# Allegro board c100s_85x45.brd
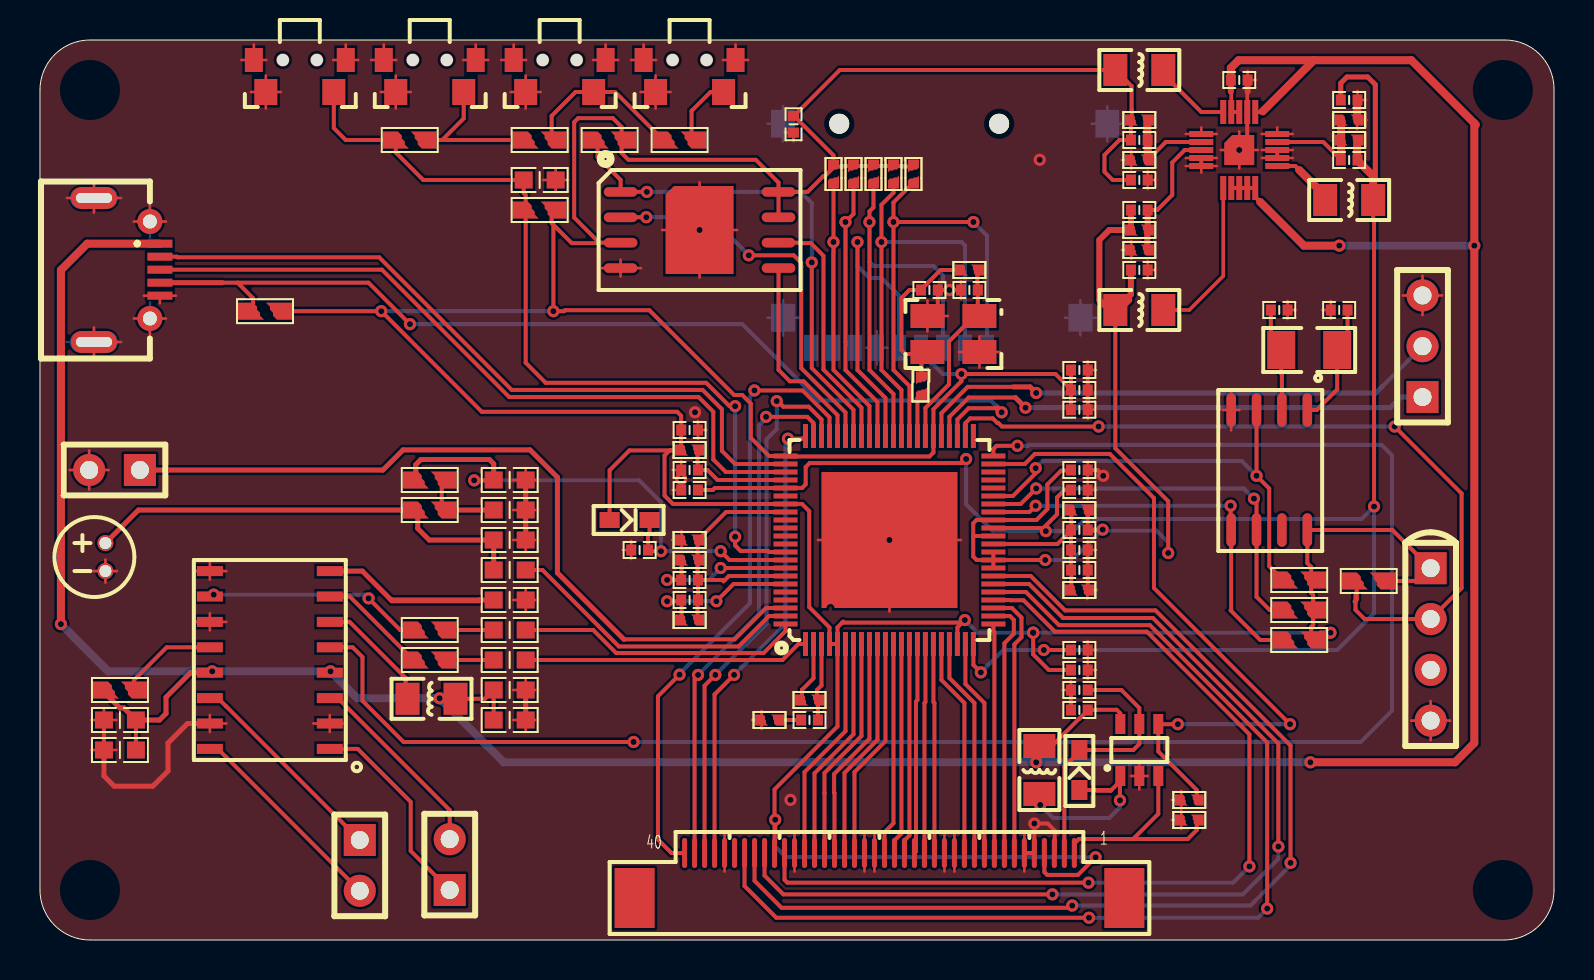
[diagram p0: board, top side]
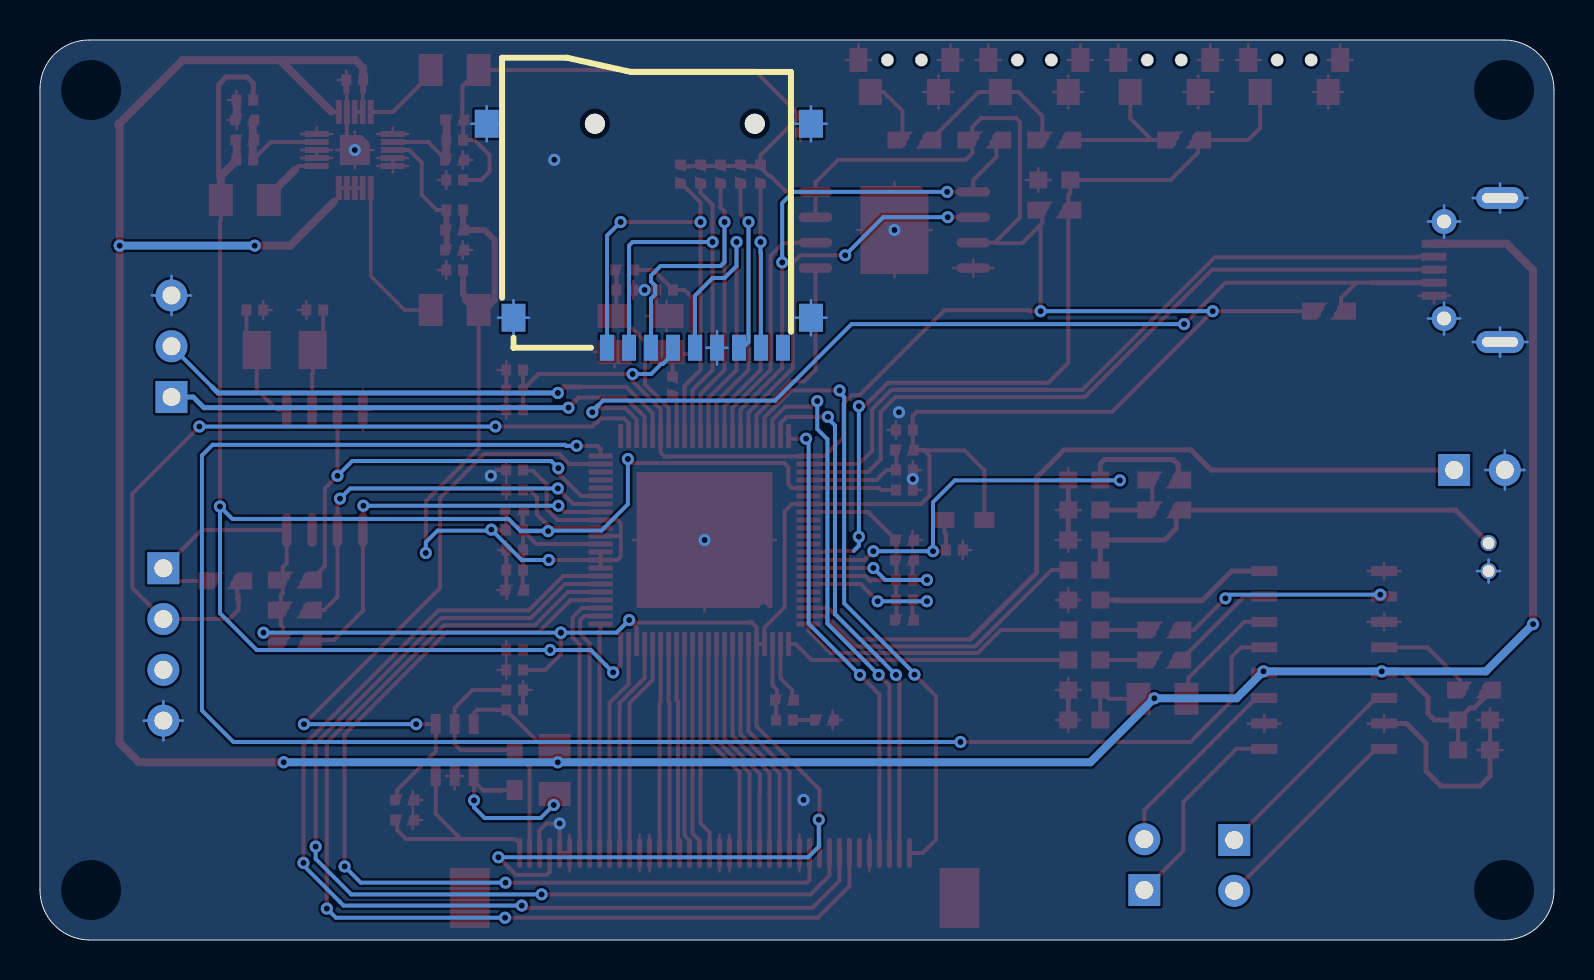
[diagram p1: board, bottom side, seen from below]

Outline 75.75 x 45 mm; copper layers: TOP, BOTTOM. Coordinates in mm from the lower left corner of the outline.
Outline path: 0,42.5 0,2.5 arc(0.73,0.73) 2.5,0 73.3,0 arc(75.03,0.75) 75.75,2.5 75.75,42.6 arc(75.01,44.3) 73.3,45 2.5,45 arc(0.73,44.27) 0,42.5

## Design rules (mm)
constraint set DEFAULT: min track width 0.127

## Placement (name value [footprint] x y rotation side)
C1  1uF  [CAP0402]  32.5 23.5 180 top
C2  33pF  [CAP0402]  46.5 32.5 0 top
C3  33pF  [CAP0402]  44.5 32.5 180 top
C4  0.1uF  [CAP0402]  37.7 40.79 270 top
C5  12pF  [CAP0402]  65 31.5 0 top
C6  12pF  [CAP0402]  62 31.5 180 top
C7  1uF  [CAP0603]  23.5 12.5 0 top
C8  10uF  [CAP0603]  23.5 11 0 top
C9  10uF  [CAP0603]  4 9.5 180 top
C10  1uF  [CAP0603]  4 11 180 top
C11  220nF  [CAP0603]  23.5 14 180 top
C12  220nF  [CAP0603]  23.5 15.5 0 top
C13  1uF  [CAP0603]  23.5 17 180 top
C14  104  [CAP0603]  25 38 0 top
C15  104  [CAP0603]  23.5 18.5 0 top
C16  220nF  [CAP0402]  38.5 11 180 top
C17  10uF  [CAP0603]  23.5 23 180 top
C18  10uF  [CAP0603]  23.5 21.5 180 top
C19  3.3nF  [CAP0603]  23.5 20 180 top
C20  220pF  [CAP0402]  55 40 180 top
C21  10uF  [CAP0402]  55 38 180 top
C22  220pF  [CAP0402]  65.5 39 180 top
C23  1uF  [CAP0402]  60 43 180 top
C24  0.1uF  [CAP0402]  32.5 25.5 0 top
C25  0.1uF  [CAP0402]  52 27.5 0 top
C26  0.1uF  [CAP0402]  52 28.5 0 top
C27  1uF  [CAP0402]  55 36.5 0 top
C28  10uF  [CAP0402]  55 33.5 0 top
C29  10uF  [CAP0402]  65.5 42 180 top
C30  1uF  [CAP0402]  52 11.5 180 top
C31  0.1uF  [CAP0402]  52 23.5 0 top
C36  0.1uF  [CAP0402]  52 22.5 0 top
C37  0.1uF  [CAP0402]  32.5 22.5 180 top
C38  0.1uF  [CAP0402]  52 14.5 0 top
C39  0.1uF  [CAP0402]  52 13.5 0 top
C40  0.1uF  [CAP0402]  52 26.51 0 top
C42  0.22uF  [CAP0402]  52 12.5 180 top
C43  0.1uF  [CAP0402]  52 20.5 180 top
C44  1uF  [CAP0402]  32.5 18 0 top
C45  1uF  [CAP0402]  32.5 17 0 top
C46  0.1uF  [CAP0402]  30 19.5 180 top
C47  0.1uF  [CAP0402]  52 19.5 0 top
C48  0.1uF  [CAP0402]  52 18.5 0 top
D1  1N4148  [1N4148-SOD323]  52 8.5 270 top
D2  1N4148  [1N4148-SOD323]  29.5 21 180 top
J1  HEADER 40/SM  [FPC-40]  42 2 0 top
J2  Debug  [HEADER1X3_2_54]  69.17 27.15 180 top
J3  -  [TF-SOCKET]  47.38 29.61 0 bottom
J4  USB  [MICROUSB]  5.5 33.5 90 top
J6  Speaker Left  [HEADER1X2_2_54]  20.5 2.5 180 top
J7  Speaker Right  [HEADER1X2_2_54]  16 5 0 top
J8  LINE IN  [HEADER1X2_2_54]  5 23.5 270 top
L1  10uH  [MLF2012]  19.59 12.06 180 top
L2  1.5uH  [MLF2012]  55 43.5 0 top
L3  1.5uH  [MLF2012]  65.5 37 0 top
L4  1.5uH  [MLF2012]  55 31.5 0 top
L5  22uH  [MLF2012]  50 8.5 270 top
R1  10K  [RES0402]  32.5 24.5 180 top
R2  1M  [RES0402]  46.5 33.5 180 top
R3  10K  [RES0603]  28.5 40 0 top
R4  0R  [RES0402]  44.1 27.7 90 top
R5  47K  [RES0402]  43.7 38.3 270 top
R6  47K  [RES0402]  42.7 38.3 270 top
R7  47K  [RES0402]  41.7 38.3 270 top
R8  10K  [RES0603]  11.26 31.44 0 top
R9  47K  [RES0402]  40.7 38.3 270 top
R10  10K  [RES0603]  66.48 17.95 0 top
R11  47K  [RES0402]  39.7 38.3 270 top
R12  10K  [RES0603]  63 16.5 0 top
R13  10K  [RES0603]  63 15 0 top
R14  10K  [RES0603]  63 18 0 top
R15  10K  [RES0603]  4 12.5 180 top
R16  10K  [RES0603]  19.5 14 180 top
R17  10K  [RES0603]  19.5 15.5 0 top
R18  100K  [RES0603]  25 36.5 0 top
R19  0R  [RES0402]  38.5 12 0 top
R20  22R  [RES0402]  36.5 11 180 top
R21  10K  [RES0603]  19.5 23 0 top
R22  10K  [RES0603]  19.5 21.5 180 top
R23  10K  [RES0603]  18.5 40 0 top
R24  10K  [RES0603]  25 40 0 top
R25  10K  [RES0603]  32 40 0 top
R26  550K  [RES0402]  55 41 180 top
R27  110K  [RES0402]  55 39 180 top
R28  47K  [RES0402]  55 34.5 180 top
R29  100K  [RES0402]  65.5 41 180 top
R30  100K  [RES0402]  65.5 40 180 top
R31  152K  [RES0402]  55 35.5 0 top
R32  5R1  [RES0402]  57.5 6 180 top
R33  100K  [RES0402]  57.5 7 180 top
R34  2K  [RES0402]  52 21.5 0 top
R35  200K  [RES0402]  32.5 19 180 top
R36  200K  [RES0402]  32.5 16 180 top
R37  2K  [RES0402]  52 17.5 180 top
R38  0R  [RES0402]  32.5 20 0 top
SW2  TS_018-4.55x3.5x1.8  [TS_018-4P55X3P5X1P8]  13 44 90 top
SW3  TS_018-4.55x3.5x1.8  [TS_018-4P55X3P5X1P8]  19.5 44 90 top
SW4  TS_018-4.55x3.5x1.8  [TS_018-4P55X3P5X1P8]  26 44 90 top
SW5  TS_018-4.55x3.5x1.8  [TS_018-4P55X3P5X1P8]  32.5 44 90 top
U1  F1C100S  [F1C100S-MQFN]  42.5 20 90 top
U2  GD5FxG4UAYIG  [GD5F1GQ4X_W25QXX_SOP8_208MIL]  33 35.5 0 top
U3  DHT11  [HEADER1X4_2_54]  69.58 18.59 0 top
U4  PCF8563  [PCF8563-SO8-3]  61.5 23.5 270 top
U5  PAM8403  [PAM8403-SOP16]  11.5 14 180 top
U6  MIC  [GMI4015-MIC]  2.72 19.15 0 top
U7  EA3036  [EA3036-QFN20]  60 39.5 0 top
U8  PT4101  [PT4101-SOT23-6]  55 9.5 90 top
Y1  YSX321SL  [YSX321SL-3_2X2_5X0_8]  45.7 30.3 180 top
Y2  32.768KHz  [CRYSTAL-3215]  63.5 29.5 0 top

## Library data of the parts
C1-C31 C36-C40 C42-C48 = CAPACITOR NON-POL
D1 D2 = DIODE
J1 = HEADER 40/SM
J2 = HEADER 3
J3 = TF-SOCKET
J4 = MICROUSB
J6-J8 = HEADER 2
L1-L5 = INDUCTOR/SM
R1-R38 = RESISTOR/SM
SW2-SW5 = TS_018-4.55x3.5x1.8
U1 = F1C100S
U2 = GD5FxG4UAYIG
U3 = DHT11
U4 = PCF8563-SOP8
U5 = PAM8403
U6 = MIC
U7 = ea3036
U8 = PT4101
Y1 = YSX321SL
Y2 = CRYSTAL/SM

## Footprints (pads in the part's own frame, mm; a bottom-side part is the same pattern mirrored in y, then rotated)
1N4148-SOD323
  custom 1x0.8 smd: 1(-1,0) 2(1,0)
CAP0402
  custom 0.5x0.55 smd: 1(-0.42,0) 2(0.42,0)
CAP0603
  custom 0.9x0.85 smd: 1(-0.8,0) 2(0.8,0)
CRYSTAL-3215
  custom 1.4x1.9 smd: 1(-1.4,0) 2(1.4,0)
EA3036-QFN20
  custom 1.2x0.3 smd: 1(-1.9,0.8) 2(-1.9,0.4) 3(-1.9,0) 4(-1.9,-0.4) 5(-1.9,-0.8) 11(1.9,-0.8) 12(1.9,-0.4) 13(1.9,0) 14(1.9,0.4) 15(1.9,0.8)
  custom 0.3x1.2 smd: 6(-0.8,-1.9) 7(-0.4,-1.9) 8(0,-1.9) 9(0.4,-1.9) 10(0.8,-1.9) 16(0.8,1.9) 17(0.4,1.9) 18(0,1.9) 19(-0.4,1.9) 20(-0.8,1.9)
  custom 1.5x1.5 smd: 21(0,0)
F1C100S-MQFN
  custom 1.2x0.25 smd: 1(-5.2,4.2) 2(-5.2,3.8) 3(-5.2,3.4) 4(-5.2,3) 5(-5.2,2.6) 6(-5.2,2.2) 7(-5.2,1.8) 8(-5.2,1.4) 9(-5.2,1) 10(-5.2,0.6) 11(-5.2,0.2) 12(-5.2,-0.2) 13(-5.2,-0.6) 14(-5.2,-1) 15(-5.2,-1.4) 16(-5.2,-1.8) 17(-5.2,-2.2) 18(-5.2,-2.6) 19(-5.2,-3) 20(-5.2,-3.4) 21(-5.2,-3.8) 22(-5.2,-4.2) 45(5.2,-4.2) 46(5.2,-3.8) 47(5.2,-3.4) 48(5.2,-3) 49(5.2,-2.6) 50(5.2,-2.2) 51(5.2,-1.8) 52(5.2,-1.4) 53(5.2,-1) 54(5.2,-0.6) 55(5.2,-0.2) 56(5.2,0.2) 57(5.2,0.6) 58(5.2,1) 59(5.2,1.4) 60(5.2,1.8) 61(5.2,2.2) 62(5.2,2.6) 63(5.2,3) 64(5.2,3.4) 65(5.2,3.8) 66(5.2,4.2)
  custom 0.25x1.2 smd: 23(-4.2,-5.2) 24(-3.8,-5.2) 25(-3.4,-5.2) 26(-3,-5.2) 27(-2.6,-5.2) 28(-2.2,-5.2) 29(-1.8,-5.2) 30(-1.4,-5.2) 31(-1,-5.2) 32(-0.6,-5.2) 33(-0.2,-5.2) 34(0.2,-5.2) 35(0.6,-5.2) 36(1,-5.2) 37(1.4,-5.2) 38(1.8,-5.2) 39(2.2,-5.2) 40(2.6,-5.2) 41(3,-5.2) 42(3.4,-5.2) 43(3.8,-5.2) 44(4.2,-5.2) 67(4.2,5.2) 68(3.8,5.2) 69(3.4,5.2) 70(3,5.2) 71(2.6,5.2) 72(2.2,5.2) 73(1.8,5.2) 74(1.4,5.2) 75(1,5.2) 76(0.6,5.2) 77(0.2,5.2) 78(-0.2,5.2) 79(-0.6,5.2) 80(-1,5.2) 81(-1.4,5.2) 82(-1.8,5.2) 83(-2.2,5.2) 84(-2.6,5.2) 85(-3,5.2) 86(-3.4,5.2) 87(-3.8,5.2) 88(-4.2,5.2)
  custom 6.8x6.8 smd: 89(0,0)
FPC-40
  rect 2x3 smd: (-12.25,0.1) (12.25,0.1)
  oval 0.25x1.5 smd: 1(9.75,2.35) 2(9.25,2.35) 3(8.75,2.35) 4(8.25,2.35) 5(7.75,2.35) 6(7.25,2.35) 7(6.75,2.35) 8(6.25,2.35) 9(5.75,2.35) 10(5.25,2.35) 11(4.75,2.35) 12(4.25,2.35) 13(3.75,2.35) 14(3.25,2.35) 15(2.75,2.35) 16(2.25,2.35) 17(1.75,2.35) 18(1.25,2.35) 19(0.75,2.35) 20(0.25,2.35) 21(-0.25,2.35) 22(-0.75,2.35) 23(-1.25,2.35) 24(-1.75,2.35) 25(-2.25,2.35) 26(-2.75,2.35) 27(-3.25,2.35) 28(-3.75,2.35) 29(-4.25,2.35) 30(-4.75,2.35) 31(-5.25,2.35) 32(-5.75,2.35) 33(-6.25,2.35) 34(-6.75,2.35) 35(-7.25,2.35) 36(-7.75,2.35) 37(-8.25,2.35) 38(-8.75,2.35) 39(-9.25,2.35) 40(-9.75,2.35)
GD5F1GQ4X_W25QXX_SOP8_208MIL
  custom 1.68x0.48 smd: 1(-3.95,1.905) 2(-3.95,0.635) 3(-3.95,-0.635) 4(-3.95,-1.905) 5(3.95,-1.905) 6(3.95,-0.635) 7(3.95,0.635) 8(3.95,1.905)
  custom 3.4x4.4 smd: 9(0,0)
GMI4015-MIC
  round 0.8 hole 0.6: 1(0.55,0.7) 2(0.55,-0.7)
HEADER1X2_2_54
  rect 1.6x1.6 hole 0.9: 1(0,0)
  round 1.6 hole 0.9: 2(0,-2.54)
HEADER1X3_2_54
  rect 1.6x1.6 hole 0.9: 1(0,0)
  round 1.6 hole 0.9: 2(0,-2.54) 3(0,-5.08)
HEADER1X4_2_54
  rect 1.6x1.6 hole 0.9: 1(0,0)
  round 1.6 hole 0.9: 2(0,-2.54) 3(0,-5.08) 4(0,-7.62)
MICROUSB
  rect 0.4x1.25 smd: 1(1.315,-0.5) 2(0.665,-0.5) 3(0.015,-0.5) 4(-0.635,-0.5) 5(-1.285,-0.5)
  round 1.25 hole 0.7: 6(-2.425,0) 7(2.425,0)
  oval 1.1x2.3 hole 0.5x1.8: 8(-3.6,2.8) 9(3.6,2.8)
MLF2012
  custom 1.2x1.6 smd: 1(-1.2,0) 2(1.2,0)
PAM8403-SOP16
  custom 1.3x0.5 smd: 1(-3,4.445) 2(-3,3.175) 3(-3,1.905) 4(-3,0.635) 5(-3,-0.635) 6(-3,-1.905) 7(-3,-3.175) 8(-3,-4.445) 9(3,-4.445) 10(3,-3.175) 11(3,-1.905) 12(3,-0.635) 13(3,0.635) 14(3,1.905) 15(3,3.175) 16(3,4.445)
PCF8563-SO8-3
  custom 1.68x0.48 smd: 1(-3,1.905) 2(-3,0.635) 3(-3,-0.635) 4(-3,-1.905) 5(3,-1.905) 6(3,-0.635) 7(3,0.635) 8(3,1.905)
PT4101-SOT23-6
  custom 1x0.5 smd: 1(-1.3,0.95) 2(-1.3,0) 3(-1.3,-0.95) 4(1.3,-0.95) 5(1.3,0) 6(1.3,0.95)
RES0402
  custom 0.65x0.55 smd: 1(-0.4,0) 2(0.4,0)
RES0603
  custom 1.3x0.85 smd: 1(-0.7,0) 2(0.7,0)
TF-SOCKET
  round 1 hole 1.1 unplated: (-7.39,-11.2) (0.61,-11.2)
  rect 0.7x1.3 smd: 1(0,0) 2(-1.1,0) 3(-2.2,0) 4(-3.3,0) 5(-4.4,0) 6(-5.5,0) 7(-6.6,0) 8(-7.7,0) 9(-8.8,0)
  rect 1.2x1.4 smd: 10(-10.2,-1.5) 11(4.68,-1.5) 12(-10.2,-11.2) 13(6.02,-11.2)
TS_018-4P55X3P5X1P8
  round 0.65 hole 0.6: (0,0.85) (0,-0.85)
  custom 1.2x0.9 smd: 1(0,2.3) 2(0,-2.3)
  custom 1.3x1.15 smd: 3(-1.6,1.7) 4(-1.6,-1.7)
YSX321SL-3_2X2_5X0_8
  custom 1.7x1.2 smd: 1(-1.3,-0.9) 2(1.3,-0.9) 3(1.3,0.9) 4(-1.3,0.9)

## Nets
1V2: C22.1 C29.2 C36.1 C37.1 C38.1 L3.2 R30.1 U1.22 U1.35 U1.71
2V5: C27.1 C28.1 C31.1 C43.1 L4.1 R31.1 R34.2 U1.30 U1.31 U1.32 U1.34 U1.36
3V3: C4.1 C20.2 C21.2 C24.1 C25.1 C26.1 C39.1 C40.1 D2.2 J1.4 J1.31 J3.4(VDD) L2.1 R1.2 R3.2 R5.1 R6.1 R7.1 R8.2 R9.1 R10.2 R11.1 R12.2 R13.2 R14.2 R18.2 R26.2 U1.4 U1.5 U1.20 U1.50 U1.67 U1.73 U2.3(W\P\/IO2) U2.7 U2.8 U3.1(VDD) U4.8
5V: C7.1 C8.1 C9.1 C10.1 C23.2 C30.1 J4.1(VBUS) L1.1 L5.1 R15.2 U5.4 U5.13 U7.7 U7.8 U7.9 U7.10 U7.16 U7.18 U7.19(VIN3) U8.6
AGND: C44.2 C45.2 R35.1 R36.1 R38.2 U1.74 U1.82
AVCC: C17.2 C46.1 D2.1(K) R21.1 U1.80
GND: C1.2 C2.1 C3.1 C4.2 C5.1 C6.1 C7.2 C8.2 C9.2 C10.2 C13.1 C14.2 C17.1 C18.1 C19.1 C21.1 C23.1 C24.2 C25.2 C26.2 C28.2 C29.1 C30.2 C31.2 C36.2 C37.2 C38.2 C39.2 C40.2 C42.2 C46.2 C47.2 C48.2 J1.3 J1.5 J1.6 J1.13 J1.14 J1.21 J1.22 J1.29 J1.36 J2.3 J3.6 J3.10 J3.11 J3.12 J3.13 J4.5 J4.6 J4.7 J4.8 J4.9 J8.2 R20.2 R27.2 R28.2 R29.1 R32.2 R33.2 R37.1 R38.1 SW2.1 SW2.2 SW2.3 SW3.1 SW3.2 SW3.3 SW4.1 SW4.2 SW4.3 SW5.1 SW5.2 SW5.3 U1.89 U2.4 U2.9 U3.4 U4.4(VSS) U5.2 U5.9 U5.11 U5.15 U6.2(-) U7.1 U7.4 U7.5 U7.12 U7.13 U7.15 U7.17 U7.21 U8.2 Y1.2 Y1.4
BL_ADJ: R33.1 U1.43 U8.4
D2: J1.28 U1.6
D3: J1.27 U1.7
D4: J1.26 U1.8
D5: J1.25 U1.9
D6: J1.24 U1.10
D7: J1.23 U1.11
D10: J1.20 U1.12
D11: J1.19 U1.13
D12: J1.18 U1.14
D13: J1.17 U1.15
D14: J1.16 U1.16
D15: J1.15 U1.17
D18: J1.12 U1.18
D19: J1.11 U1.19
D20: J1.10 U1.21
D21: J1.9 U1.23
D22: J1.8 U1.24
D23: J1.7 U1.25
DE: J1.34 U1.27
HPCOM: C16.1 R19.2 U1.3
HPCOMFB: R19.1 U1.2
HPL: C11.1 U1.1
HPR: C12.2 U1.88
HSYNC: J1.32 U1.28
LCD_CLK: J1.30 U1.26
LED+: C42.1 D1.1(K) J1.2 U8.5
LED-: J1.1 R32.1 U8.3
LINE_IN: J8.1 U1.86
LRADC: C14.1 R18.1 R23.1 SW2.4 U1.79
MIC_IN: C15.2 U1.87
MUTE: U1.44 U5.5
OSCI: C2.2 R2.1 U1.51 Y1.1
OSCO: R4.1 U1.52
OUTLM: J6.2 U5.3
OUTLP: J6.1 U5.1
OUTRM: J7.1 U5.14
OUTRP: J7.2 U5.16
PE3: R10.1 U1.46 U3.2
PE4: U1.45
PE7: U1.42
PE8: U1.41
PE9: U1.40
RESET: C1.1 R1.1 U1.70
RTC_INT: R14.1 U1.39 U4.3
RTC_OSCI: C5.2 U4.1 Y2.2
RTC_OSCO: C6.2 U4.2 Y2.1
SDC0_CLK: J3.5 U1.56
SDC0_CMD: J3.3 R7.2 U1.55
SDC0_D0: J3.7 R9.2 U1.57
SDC0_D1: J3.8 R11.2 U1.58
SDC0_D2: J3.1 R5.2 U1.53
SDC0_D3: J3.2 R6.2 U1.54
SF_CLK: U1.59 U2.6
SF_CS: R3.1 U1.60 U2.1
SF_MISO: U1.61 U2.2
SF_MOSI: U1.62 U2.5
SVREF: C43.2 C47.1 C48.1 R34.1 R37.2 U1.33
TWI0_SCK: R12.1 U1.38 U4.6
TWI0_SDA: R13.1 U1.37 U4.5
UART0_RX: J2.2 U1.49
UART0_TX: J2.1 U1.48
USB_DM: J4.2 U1.68
USB_DP: J4.3 U1.69
USB_ID: J4.4 R8.1 U1.47
VRA1: C44.1 R35.2 U1.81
VRA2: C45.1 R36.2 U1.83(VRA2)
VSYNC: J1.33 U1.29
X1: J1.37 U1.66
X2: J1.39 U1.65
Y1: J1.38 U1.64
Y2: J1.40 U1.63
N101915: C20.1 R26.1 R27.1 U7.2
N101919: C27.2 R28.1 R31.2 U7.3
N101966: C22.2 R29.2 R30.2 U7.14
N128635: L1.2 U5.6
N129017: R15.1 U5.12
N129187: R16.2 U5.7
N129191: C11.2 R16.1
N129199: R17.1 U5.10
N129203: C12.1 R17.2
N129856: C13.2 U5.8(VREF)
N131139: L4.2 U7.6
N132697: L2.2 U7.20
N136168: L3.1 U7.11
N140867: D1.2 L5.2 U8.1(SW)
N153627: C18.2 R21.2 R22.1
N153631: C15.1 C19.2 R22.2 U6.1
N181376: R23.2 R24.1 SW3.4
N181384: R24.2 R25.1 SW4.4
N181692: R25.2 SW5.4
N218026: C3.2 R2.2 R4.2 Y1.3(XOUT)
N1977121: C16.2 R20.1

Pads without a net: J1 35; J3 9; U1 72 75 76 77 78 84 85; U3 3; U4 7

## Via types
v1: diameter 0.61, hole 0.305, TOP to BOTTOM, 91 vias

## Routing (per net, layer and track width the routed paths; a pad name or vN(x,y) marks a point on that pad's centre or on a via; arc(x,y) is an arc through that point)
1V2: length 100.5
  TOP w0.2: v1(46.34,24.05) 46.13,23.85 38.51,23.85 38.31,23.65 38.31,22.78 38.13,22.6 U1.71 33.76,22.6 33.66,22.5 C37.1 ; C36.1 51.26,22.5 50.88,22.13 50.88,21.28 50.2,20.6 ; v1(47.07,13.38) 46.7,13.75 U1.22 ; v1(50.32,20.44) 50.2,20.56 50.2,20.6 ; 50.2,20.6 U1.35 ; v1(66.74,21.67) 66.74,35.93 66.7,35.97 L3.2 ; C38.1 v1(50.22,14.5)
  TOP w0.25: C29.2 65.08,42.84 65.39,43.15 66.43,43.15 66.81,42.77 66.81,38.16 66.7,38.05
  TOP w0.4: R30.1 65.9,39.02 C22.1 65.92,38.98 66.7,38.2 L3.2
  BOTTOM w0.2: v1(47.07,13.38) 47.45,13.76 48.19,14.5 v1(50.22,14.5) 64.9,14.5 66.74,16.34 v1(66.74,21.67) 66.12,21.05 52.3,21.05 51.72,20.47 ; 51.72,20.47 47.66,20.47 46.34,21.79 v1(46.34,24.05) ; 51.72,20.47 51.69,20.44 v1(50.32,20.44)
2V5: length 48.1
  TOP w0.2: 46.69,20.16 46.69,19.17 46.86,19 U1.31 ; 46.69,20.16 46.69,20.84 46.85,21 U1.36 49.85,21 50.4,21.54 50.4,22.78 51.09,23.47 51.55,23.47 C31.1 ; 46.69,20.16 46.73,20.2 U1.34 ; L4.1 53.8,24.59 56.44,21.94 v1(56.44,19.35) ; C43.1 53.19,20.5 53.22,20.47 52.45,20.47 C43.1 ; C43.1 52.42,21.48 R34.2 ; C43.1 52.44,20.52 v1(53.17,20.52) ; U1.31 U1.32 ; U1.31 v1(50.29,19) ; U1.31 U1.30
  TOP w0.3: L4.1 53.5,31.5 53,32 53,35 53.5,35.5 R31.1 54.58,35.52 C27.1 ; L4.1 54.58,32.28 C28.1 ; L4.1 54,31.5 54.5,32
  BOTTOM w0.2: v1(56.44,19.35) 56.44,19.88 55.86,20.47 53.22,20.47 v1(53.17,20.52) 51.65,19 v1(50.29,19)
3V3: length 241
  TOP w0.2: U1.5 U1.4 39.5,15.63 38.49,16.64 38.49,21.44 38.13,21.8 U1.73 31.67,21.8 31.25,22.22 31.25,24.23 31.5,24.48 ; U1.5 39.9,15.63 40.14,15.87 ; U1.5 39.9,10.68 36.75,7.53 36.75,5.33 ; C26.1 51.58,27.52 ; 51.58,27.52 50.8,28.3 v1(46.1,28.3) 46.1,27.94 44.7,26.54 U1.50 44.7,24.37 44.5,24.18 37.32,24.18 U1.67 36.47,24.2 35.57,25.11 35.57,26.82 35.13,27.25 34.73,27.25 30.49,31.49 26.27,31.49 26.22,31.44 v1(25.69,31.44) 25.69,35.76 ; 51.58,27.52 C25.1 C40.1 ; D2.2 28.5,23.49 29.5,24.48 31.5,24.48 ; 31.55,24.48 31.57,24.5 31.78,24.5 ; 31.55,24.48 31.76,24.48 31.78,24.5 ; 31.55,24.48 31.5,24.48 ; 27.98,34.87 27.96,34.84 26.6,34.84 25.69,35.76 ; 27.98,34.87 26.73,36.12 26.73,40.89 26.93,41.09 28.66,41.09 29.1,40.65 29.1,40.1 R3.2 29.1,39.9 29.1,39.35 29.44,39.01 35.81,39.01 36.95,37.87 U2.8 ; 27.98,34.87 U2.3 ; v1(52.81,4.14) 51.93,3.25 50.39,3.25 50.25,3.4 J1.4 ; 36.75,5.33 36.78,5.36 v1(36.78,6.02) ; 36.75,5.33 J1.31 ; R11.1 39.7,39.23 37.72,41.21 ; R11.1 39.73,38.67 40.2,38.67 40.23,38.7 R9.1 R7.1 R6.1 43.17,38.7 43.2,38.67 43.67,38.67 R5.1 ; R11.1 39.7,38.62 39.26,38.19 39.19,38.19 38.41,37.41 U2.8 ; 40.14,15.87 40.19,15.92 ; 40.14,15.87 46.14,15.87 ; v1(49.69,15.37) 49.69,14.28 50.47,13.5 C39.1 ; 46.14,15.87 45.9,15.63 U1.20 ; 46.14,15.87 v1(46.27,16) ; 31.78,24.5 R1.2 32.08,24.52 C24.1 32.08,26.21 31.88,26.41 22.1,26.41 v1(17.07,31.44) R8.2 ; C4.1 37.72,41.21 ; 37.72,41.21 40.02,43.5 L2.1 53.81,43.5 54.62,42.69 54.62,41.51 54.62,41.5 54.62,41.02 R26.2 54.58,40.98 C20.2 54.01,40 53.26,39.25 53.26,38.41 53.67,38 C21.2 ; R18.2 25.6,36.4 25.6,35.85 25.69,35.76 ; v1(64.57,15.37) 64.07,15.37 R13.2 63.6,15.1 63.6,15.65 63.7,15.75 R12.2 63.7,17.25 63.6,17.35 63.6,17.9 R14.2 63.6,18.1 63.6,18.65 63.41,18.85 U4.8 67.66,20.5 U3.1 68.94,17.95 R10.2 ; U2.8 U2.7
  BOTTOM w0.2: v1(46.1,28.3) 45.17,28.3 44.67,28.8 44.59,28.8 44.08,29.31 J3.4 ; v1(64.57,15.37) v1(49.69,15.37) 46.9,15.37 v1(46.27,16) ; v1(36.78,6.02) 36.78,4.67 37.32,4.14 v1(52.81,4.14) ; v1(17.07,31.44) v1(25.69,31.44)
5V: length 181.8
  TOP w0.18: U7.19 59.6,42.4 59.58,42.42
  TOP w0.2: 61.05,36.9 60.8,37.15 U7.10 U7.9 U7.8 U7.7 ; C8.1 C7.1 22.26,12.06 L1.1 20.02,12.06 v1(20,12.09) ; 61.18,41.43 61.15,41.4 U7.16 ; U8.6 54.05,11.33 53.87,11.51 52.91,11.51 52.9,11.5 C30.1 52.42,11.47 52.01,11.06 51.99,11.06 50.63,9.7 L5.1 50,9.04 v1(49.84,8.89) ; U7.19 U7.18 ; C10.1 C9.1
  TOP w0.25: U5.13 7.53,13.37 6.3,12.14 6.3,11.32 5.98,11 C10.1 4.2,11.6 3.99,11.6 3.3,12.3 R15.2
  TOP w0.3: C23.2 59.58,42.42
  TOP w0.4: 71.76,40.84 68.61,43.99 63.73,43.99 ; 71.76,40.84 71.84,40.76 ; 71.76,40.84 v1(71.76,34.72) 71.76,9.85 70.8,8.89 v1(63.56,8.89) ; 63.73,43.99 59.97,43.99 59.58,43.6 C23.2 ; 63.73,43.99 61.18,41.43 ; v1(1.05,15.79) 1.05,33.5 2.36,34.81 J4.1 ; v1(65,34.72) 63.23,34.72 61.05,36.9
  BOTTOM w0.4: v1(65,34.72) v1(71.76,34.72) ; v1(1.05,15.79) 3.41,13.43 v1(8.62,13.43) v1(14.53,13.43) 15.88,12.09 v1(20,12.09) 23.2,8.89 v1(49.84,8.89) v1(63.56,8.89)
AGND: length 13.6
  TOP w0.2: 34.27,18 34.19,17.93 ; 34.27,18 C44.2 ; 34.27,18 34.47,18.2 U1.82 ; R36.1 32.9,16.98 C45.2 C44.2 ; C44.2 32.9,18.02 R35.1 R38.2 32.92,20 34.33,21.4 U1.74
AVCC: length 27.5
  TOP w0.2: C17.2 22.68,22.98 v1(21.72,22.98) ; v1(31.07,19.44) 30.48,19.44 C46.1 30.42,20.29 30.5,20.37 D2.1 ; v1(34.05,19.44) 34.49,19 34.84,19 34.84,19 35.22,19 35.22,19 U1.80
  TOP w0.25: R21.1 18.8,23 18.8,23.77 19.06,24.02 22.48,24.02 22.7,23.81 C17.2
  BOTTOM w0.2: v1(34.05,19.44) v1(31.07,19.44) 31.07,21.89 29.98,22.98 v1(21.72,22.98)
GND: length 254.4
  TOP w0.127: 32.08,22.95 C37.2 31.65,22.5 ; J8.2 3.44,23.5 ; J8.2 2.46,24.48 ; J8.2 1.48,23.5 ; J8.2 2.46,22.52 ; 45.75,3.42 J1.13 45.75,5.28 ; U7.5 58.88,38.7 ; U7.5 58.1,38.37 ; U7.5 57.32,38.7 ; 59.07,39.5 v1(60,39.5) ; v1(60,39.5) 60.93,39.5 ; v1(60,39.5) 60,40.43 ; v1(60,39.5) 60,38.57 ; 16.57,44 SW3.1 ; SW3.1 17.2,44.78 ; SW3.1 17.83,44 ; 65.9,40.55 R29.1 66.38,41 ; 59.18,26.5 U4.4 ; U4.4 60.01,26.5 ; U4.4 59.59,27.52 ; U4.4 59.59,25.48 ; 49.25,5.28 J1.6 49.25,3.42 ; U8.2 55.43,8.2 ; U8.2 55,8.88 ; U8.2 55,7.52 ; U8.2 54.57,8.2 ; 52.42,22.05 C36.2 ; C36.2 52.42,22.95 ; C36.2 52.85,22.5 ; 30.05,42.4 SW5.3 ; SW5.3 30.8,43.23 ; SW5.3 31.55,42.4 ; SW5.3 30.8,41.57 ; 52.42,23.05 C31.2 52.42,23.95 ; 32.92,25.05 C24.2 ; C24.2 32.92,25.95 ; C24.2 33.35,25.5 ; J2.3 69.17,33.21 ; J2.3 68.19,32.23 ; J2.3 69.17,31.25 ; J2.3 70.15,32.23 ; 37.7,39.94 C4.2 37.25,40.37 ; 45.25,5.28 J1.14 45.25,3.42 ; 24.3,16.4 C13.1 ; C13.1 23.67,17 ; C13.1 24.93,17 ; C13.1 24.3,17.6 ; 54.12,34.5 R28.2 ; R28.2 54.6,34.05 ; R28.2 54.6,34.95 ; v1(33,35.5) 33,37.88 ; v1(33,35.5) 31.12,35.5 ; v1(33,35.5) 33,33.12 ; v1(33,35.5) 34.88,35.5 ; 41.75,3.42 J1.21 41.75,5.28 ; U5.2 15.33,10.82 ; U5.2 14.5,10.4 ; U5.2 14.5,11.25 ; U5.2 13.67,10.82 ; SW3.2 21.8,44.78 ; SW3.2 21.17,44 ; SW3.2 22.43,44 ; 25.17,38 C14.2 ; C14.2 25.8,37.4 ; C14.2 26.43,38 ; C14.2 25.8,38.6 ; 2.57,11 C10.2 ; C10.2 3.83,11 ; C10.2 3.2,11.6 ; 69.58,9.99 U3.4 ; U3.4 68.6,10.97 ; U3.4 69.58,11.95 ; U3.4 70.55,10.97 ; J4.9 2.7,37.83 ; J4.9 2.7,36.37 ; J4.9 1.37,37.1 ; J4.9 4.03,37.1 ; 52.42,13.05 C39.2 ; C39.2 52.42,13.95 ; C39.2 52.85,13.5 ; 24.93,21.5 C18.1 23.67,21.5 ; C6.1 62.85,31.5 ; C6.1 62.42,31.05 ; C6.1 62.42,31.95 ; 55.42,37.55 C21.1 ; C21.1 55.42,38.45 ; C21.1 55.85,38 ; U5.11 8.5,16.33 ; U5.11 9.33,15.91 ; U5.11 7.67,15.91 ; U5.11 8.5,15.48 ; 23.67,12.5 C7.2 ; C7.2 24.3,13.1 ; C7.2 24.93,12.5 ; 60.85,43 C23.1 60.42,43.45 ; 51.15,12.5 C42.2 51.58,12.95 ; 47,28.62 Y1.4 ; Y1.4 48.03,29.4 ; Y1.4 45.97,29.4 ; Y1.4 47,30.18 ; 11.3,41.57 SW2.3 ; SW2.3 12.05,42.4 ; SW2.3 11.3,43.23 ; SW2.3 10.55,42.4 ; SW5.2 35.43,44 ; SW5.2 34.8,44.78 ; SW5.2 34.17,44 ; R27.2 54.6,39.45 ; R27.2 54.6,38.55 ; R27.2 54.12,39 ; 55.42,33.05 C28.2 ; C28.2 55.85,33.5 ; C28.2 55.42,33.95 ; 52.85,28.5 C26.2 52.42,28.95 ; 2.57,9.5 C9.2 3.83,9.5 ; 34.25,5.28 J1.36 34.25,3.42 ; 58.88,39.1 U7.4 57.32,39.1 ; U5.9 9.33,18.45 ; U5.9 8.5,18.02 ; U5.9 7.67,18.45 ; U5.9 8.5,18.87 ; 38.92,20 v1(42.5,20) ; v1(42.5,20) 42.5,16.42 ; v1(42.5,20) 46.08,20 ; Y1.2 44.4,31.98 ; Y1.2 45.43,31.2 ; Y1.2 44.4,30.42 ; 31.65,23.5 C1.2 ; C1.2 32.08,23.95 ; C1.2 v1(32.08,23.05) ; 10.07,44 SW2.1 ; SW2.1 10.7,44.78 ; SW2.1 11.33,44 ; 37.75,5.28 J1.29 37.75,3.42 ; 31.62,20 R38.1 ; R38.1 32.1,20.45 ; R38.1 32.1,19.55 ; 23.55,42.4 SW4.3 ; SW4.3 24.3,43.23 ; SW4.3 25.05,42.4 ; SW4.3 24.3,41.57 ; 5.5,30.27 J4.6 ; J4.6 4.7,31.07 ; J4.6 6.3,31.07 ; C29.1 66.35,42 ; C29.1 65.92,41.55 ; C29.1 65.92,42.45 ; 46.08,32.95 C2.1 46.08,32.05 ; 29.15,19.5 C46.2 ; C46.2 29.58,19.95 ; C46.2 29.58,19.05 ; 64.15,31.5 C5.1 ; C5.1 64.58,31.05 ; C5.1 64.58,31.95 ; 36.1,10.55 R20.2 ; R20.2 36.1,11.45 ; R20.2 35.62,11 ; 23.67,11 C8.2 ; C8.2 24.3,10.4 ; C8.2 24.93,11 ; U7.15 62.68,40.3 ; U7.15 61.12,40.3 ; U7.15 61.9,40.63 ; 62.68,39.5 U7.13 61.12,39.5 ; 2.7,29.17 J4.8 ; J4.8 4.03,29.9 ; J4.8 2.7,30.63 ; C19.1 24.93,20 ; C19.1 24.3,19.4 ; C19.1 23.67,20 ; C17.1 24.3,23.6 ; C17.1 24.93,23 ; C17.1 23.67,23 ; SW2.2 15.93,44 ; SW2.2 15.3,44.78 ; SW2.2 14.67,44 ; SW4.2 28.3,44.78 ; SW4.2 28.93,44 ; SW4.2 27.67,44 ; 29.57,44 SW5.1 ; SW5.1 30.2,44.78 ; SW5.1 30.83,44 ; 3.27,17.87 U6.2 ; U6.2 2.7,18.45 ; U6.2 3.85,18.45 ; U6.2 3.27,19.03 ; 23.07,44 SW4.1 ; SW4.1 24.33,44 ; SW4.1 23.7,44.78 ; 52.4,17.05 R37.1 ; R37.1 52.88,17.5 ; R37.1 52.4,17.95 ; 57.1,6.55 R33.2 ; R33.2 56.62,7 ; R33.2 57.1,7.45 ; 57.1,5.55 R32.2 ; R32.2 57.1,6.45 ; R32.2 56.62,6 ; 41.25,5.28 J1.22 41.25,3.42 ; 52.42,26.06 C40.2 52.85,26.51 ; U5.15 8.5,11.25 ; U5.15 9.33,10.82 ; U5.15 8.5,10.4 ; J4.5 6.8,32.22 ; J4.5 6,31.84 ; J4.5 5.2,32.22 ; 52.42,14.05 C38.2 ; C38.2 52.85,14.5 ; C38.2 52.42,14.95 ; J4.7 6.3,35.92 ; J4.7 4.7,35.92 ; J4.7 5.5,36.73 ; 52.42,19.95 C47.2 52.85,19.5 ; SW3.3 17.8,43.23 ; SW3.3 18.55,42.4 ; SW3.3 17.8,41.57 ; SW3.3 17.05,42.4 ; U7.1 58.1,40.63 ; U7.1 57.32,40.3 ; U7.1 58.88,40.3 ; U2.4 30.07,33.59 ; U2.4 29.05,34.01 ; U2.4 29.05,33.18 ; U2.4 28.03,33.59 ; 61.12,39.1 U7.12 62.68,39.1
  TOP w0.18: 60.42,42.42 60.4,42.4 U7.17
  TOP w0.2: C42.2 C30.2 ; v1(60,39.5) 60.4,39.9 U7.17 ; Y1.2 44.92,31.72 C3.1 v1(45.5,32.5) C2.1 ; C47.2 C48.2 52.42,17.52 R37.1 ; v1(53.19,23.21) 52.9,23.5 C31.2 ; C26.2 C25.2 52.42,27.02 C40.2 ; U7.4 U7.5 ; C10.2 C9.2 ; J1.6 J1.5 v1(49.75,5.82) 50.41,5.82 50.77,5.47 50.77,4.37 J1.3 ; U7.13 U7.12
  TOP w0.25: C19.1 C18.1 C17.1 ; C9.2 3.2,8.21 3.71,7.69 5.64,7.69 6.41,8.45 6.41,9.85 7.38,10.82 U5.15 ; C7.2 C8.2
  TOP w0.3: C23.1 60.42,42.42
  TOP w0.4: R29.1 65.9,41.98 C29.1
  BOTTOM w0.127: 37.18,39.93 J3.12 ; J3.12 36.4,40.81 ; J3.12 37.95,40.81 ; J3.12 37.18,41.69 ; J4.7 6.3,35.92 ; J4.7 5.5,35.12 ; J4.7 5.5,36.73 ; J4.7 4.7,35.92 ; 69.58,9.99 U3.4 ; U3.4 69.58,11.95 ; U3.4 70.55,10.97 ; U3.4 68.6,10.97 ; U6.2 3.85,18.45 ; U6.2 2.7,18.45 ; U6.2 3.27,19.03 ; U6.2 3.27,17.87 ; J3.6 42.4,29.61 ; J3.6 41.35,29.61 ; J3.6 41.88,28.78 ; J3.6 41.88,30.44 ; J4.6 5.5,31.88 ; J4.6 4.7,31.07 ; J4.6 5.5,30.27 ; J4.6 6.3,31.07 ; J3.10 37.18,31.99 ; J3.10 37.18,30.23 ; J3.10 37.95,31.11 ; J3.10 36.4,31.11 ; 2.7,36.37 J4.9 ; J4.9 4.08,37.1 ; J4.9 1.32,37.1 ; J4.9 2.7,37.83 ; J2.3 69.17,33.21 ; J2.3 69.17,31.25 ; J2.3 68.19,32.23 ; J2.3 70.15,32.23 ; J4.8 2.7,30.63 ; J4.8 4.08,29.9 ; J4.8 2.7,29.17 ; J4.8 1.32,29.9 ; J8.2 2.46,24.48 ; J8.2 3.44,23.5 ; J8.2 1.48,23.5 ; J8.2 2.46,22.52 ; J3.13 54.17,40.81 ; J3.13 52.62,40.81 ; J3.13 53.4,41.69 ; J3.13 53.4,39.93 ; J3.11 52.83,31.11 ; J3.11 52.06,31.99 ; J3.11 52.06,30.23 ; J3.11 51.28,31.11
  BOTTOM w0.2: 37.57,7.01 v1(37.55,7.01)
  vias: v1(32.77,26.39) v1(50.02,39.01)
BL_ADJ: length 34.5
  TOP w0.2: R33.1 57.88,7.03 57.88,7.5 55.95,9.43 U8.4 55.96,10.79 v1(56.93,10.79) ; v1(62.54,10.79) 55.73,17.6 55.73,22.09 53.52,24.3 49.77,24.3 49.27,23.8 U1.43
  BOTTOM w0.2: v1(62.54,10.79) v1(56.93,10.79)
D2: length 11.3
  TOP w0.2: U1.6 40.3,10.44 38.25,8.39 J1.28
D3: length 11.3
  TOP w0.2: U1.7 40.7,10.29 38.75,8.34 J1.27
D4: length 11.2
  TOP w0.2: U1.8 41.1,10.2 39.25,8.35 39.25,7.35 39.25,7.35 J1.26
D5: length 11.2
  TOP w0.2: U1.9 41.5,10.07 39.73,8.3 39.73,7.37 39.75,7.35 J1.25
D6: length 11.1
  TOP w0.2: J1.24 40.25,8.36 41.9,10.01 U1.10
D7: length 11.1
  TOP w0.2: U1.11 42.3,9.95 40.75,8.39 J1.23
D10: length 10.6
  TOP w0.2: J1.20 42.25,5.39 42.7,5.84 U1.12
D11: length 10.6
  TOP w0.2: U1.13 43.1,5.32 42.75,4.98 J1.19
D12: length 10.6
  TOP w0.2: J1.18 43.25,4.98 43.5,5.23 U1.14
D13: length 10.5
  TOP w0.2: U1.15 43.9,12 43.83,11.93 43.83,4.43 J1.17
D14: length 10.5
  TOP w0.2: U1.16 44.3,11.9 44.25,11.85 J1.16
D15: length 10.5
  TOP w0.2: J1.15 44.75,11.85 44.7,11.9 U1.17
D18: length 10.9
  TOP w0.2: U1.18 45.1,13 46.25,11.85 J1.12
D19: length 11
  TOP w0.2: J1.11 46.75,11.85 45.5,13.1 U1.19
D20: length 10.8
  TOP w0.2: J1.10 47.25,11.85 46.3,12.8 U1.21
D21: length 11.5
  TOP w0.2: J1.9 47.75,15.4 47.7,15.45 U1.23
D22: length 13
  TOP w0.2: U1.24 48.53,16.2 48.72,16 48.72,15.31 48.25,14.84 J1.8
D23: length 13.5
  TOP w0.2: J1.7 48.75,14.78 49.1,15.13 49.1,16.12 48.63,16.6 U1.25
DE: length 53.9
  TOP w0.2: U1.27 49.33,17.4 50.98,15.74 55.53,15.74 61.4,9.88 v1(61.4,1.57) ; v1(52.48,1.11) 36.84,1.11 35.25,2.7 J1.34
  BOTTOM w0.2: 61.46,1.63 v1(61.4,1.57) 60.94,1.11 v1(52.48,1.11)
HPCOM: length 3.9
  TOP w0.2: U1.3 39.1,12.73 38.88,12.5 38.88,12.03 R19.2 38.92,11.98 C16.1
HPCOMFB: length 3
  TOP w0.2: R19.1 38.12,12.03 38.12,12.51 38.7,13.09 U1.2
HPL: length 14.3
  TOP w0.2: U1.1 37.95,14.8 37.15,14 C11.1
HPR: length 14.3
  TOP w0.2: U1.88 37.3,15.45 36.2,14.35 28.83,14.35 27.68,15.5 C12.2
HSYNC: length 51.3
  TOP w0.2: J1.32 36.25,3.22 37.19,2.28 v1(50.65,2.28) ; v1(61.96,4.67) 61.96,9.83 55.68,16.1 51.19,16.1 49.49,17.8 U1.28
  BOTTOM w0.2: v1(50.65,2.28) 60.18,2.28 61.96,4.06 v1(61.96,4.67)
LCD_CLK: length 47.2
  TOP w0.2: J1.30 37.25,3.01 37.39,2.87 v1(52.46,2.87) ; v1(60.51,3.68) 60.51,10.28 55.37,15.42 50.78,15.42 49.21,16.99 48.54,16.99 48.53,17 U1.26
  BOTTOM w0.2: v1(60.51,3.68) 59.7,2.87 v1(52.46,2.87)
LED+: length 13.3
  TOP w0.2: J1.2 51.25,8.65 52,9.4 D1.1 54.7,9.5 55,9.8 U8.5 55,11.6 54.1,12.5 C42.1
LED-: length 11.1
  TOP w0.2: U8.3 55.95,6.31 54.69,5.05 ; 54.69,5.05 57.43,5.05 57.88,5.5 57.88,5.98 R32.1 ; 54.69,5.05 51.98,5.05 51.75,4.82 J1.1
LINE_IN: length 40.1
  TOP w0.2: U1.86 36.32,16.6 34.75,15.03 29.22,15.03
  TOP w0.25: 29.22,15.03 25.89,18.36 25.89,23.14 24.52,24.51 18.17,24.51 17.16,23.5 J8.1
LRADC: length 43.7
  TOP w0.2: v1(34.78,20.16) 34.78,19.73 35.06,19.45 36.42,19.45 36.47,19.4 U1.79 ; SW2.4 14.7,40.6 15.3,40 R23.1 17.8,39.38 19.18,38 C14.1 24.2,37.35 24.3,37.25 R18.1 24.3,28.86 25.3,27.86 33.33,27.86 34.5,26.69 v1(34.78,26.69)
  BOTTOM w0.2: 35.03,19.45 34.78,19.71 v1(34.78,20.16) v1(34.78,26.69)
MIC_IN: length 15.2
  TOP w0.2: U1.87 36.47,16.2 34.95,14.68 28.96,14.68 25.14,18.5 C15.2
MUTE: length 90.4
  TOP w0.2: v1(29.7,9.9) 18.19,9.9 16.13,11.96 16.13,14.14 15.64,14.63 U5.5 ; U1.44 47.7,24.55 47.86,24.71 v1(48.9,24.71)
  BOTTOM w0.2: v1(29.7,9.9) 66.07,9.9 67.65,11.48 67.65,24.23 67.11,24.76 49.48,24.76 49.43,24.71 v1(48.9,24.71)
OSCI: length 9.6
  TOP w0.2: U1.51 44.3,26.6 45.48,27.78 45.48,29.93 46.75,31.2 Y1.1 46.92,31.28 C2.2 46.9,32.52 R2.1
OSCO: length 2.2
  TOP w0.2: U1.52 43.9,27.1 R4.1
OUTLM: length 9.8
  TOP w0.2: U5.3 14.9,12.1 20.5,6.5 J6.2
OUTLP: length 10.4
  TOP w0.2: U5.1 15.9,9.55 18.55,6.9 18.55,4.45 J6.1
OUTRM: length 10.4
  TOP w0.2: J7.1 9.32,11.68 9.31,11.68 8.9,12.1 U5.14
OUTRP: length 10.4
  TOP w0.2: U5.16 8.9,9.55 9.31,9.14 9.32,9.14 J7.2
PE3: length 39.9
  TOP w0.2: 65.82,16.89 65.82,17.24 ; 65.82,16.89 65.82,16.51 66.27,16.05 U3.2 71.13,17.6 71.13,22.32 v1(67.77,25.68) ; 65.82,16.89 65.78,16.93 65.88,17.03 65.88,17.85 R10.1 ; U1.46 46.3,25.85 46.54,26.08 47.67,26.08 47.89,25.85 47.94,25.85 48.12,25.68 v1(52.96,25.68)
  BOTTOM w0.2: v1(52.96,25.68) v1(67.77,25.68)
RESET: length 5.6
  TOP w0.2: U1.70 33.9,23 33.4,23.5 C1.1 32.9,23.52 R1.1
RTC_INT: length 23.5
  TOP w0.2: v1(49.82,23.59) 49.82,23.34 48.68,22.2 U1.39 ; U4.3 v1(60.86,23.21) 61.5,22.58 61.5,18.69 62.19,18 R14.1
  BOTTOM w0.2: v1(60.86,23.21) 60.13,23.95 50.17,23.95 v1(49.82,23.59)
RTC_OSCI: length 6.1
  TOP w0.2: U4.1 63.87,26.5 64.9,27.53 Y2.2 65.42,30.02 C5.2
RTC_OSCO: length 5.2
  TOP w0.2: C6.2 61.58,30.02 Y2.1 62.1,28.32 62.14,28.29 U4.2
SDC0_CLK: length 17.5
  TOP w0.2: v1(40.9,34.9) 40.9,28.5 42.3,27.1 U1.56
  BOTTOM w0.2: 42.98,30.3 42.98,29.62 J3.5 42.98,32.22 42.1,33.1 41.5,33.1 40.9,33.7 v1(40.9,34.9)
SDC0_CMD: length 23
  TOP w0.2: U1.55 42.7,27.3 41.5,28.5 v1(41.5,35.9) 41.5,36.43 41.7,36.63 R7.2
  BOTTOM w0.2: J3.3 45.18,32.07 44.97,32.28 44.97,32.72 45.18,32.93 45.18,33.22 44.7,33.7 41.7,33.7 41.5,33.9 v1(41.5,35.9)
SDC0_D0: length 20.1
  TOP w0.2: R9.2 40.7,36.3 v1(40.3,35.9) 40.3,28.5 41.9,26.9 U1.57
  BOTTOM w0.2: v1(40.3,35.9) 40.3,29.9 40.59,29.61 J3.7
SDC0_D1: length 18.7
  TOP w0.2: R11.2 v1(39.7,34.9) 39.7,28.5 41.5,26.7 U1.58
  BOTTOM w0.2: J3.8 39.68,34.34 39.7,34.37 v1(39.7,34.9)
SDC0_D2: length 24
  TOP w0.2: U1.53 43.5,27.7 42.7,28.5 v1(42.7,35.9) ; R5.2 43.7,37.88 42.7,36.88 v1(42.7,35.9) ; v1(42.7,35.9) v1(46.7,35.9)
  BOTTOM w0.2: v1(46.7,35.9) 47.38,35.22 J3.1
SDC0_D3: length 22.7
  TOP w0.2: R6.2 42.7,37.36 42.1,36.76 v1(42.1,34.9) 42.1,28.5 43.1,27.5 U1.54
  BOTTOM w0.2: v1(42.1,34.9) 46.1,34.9 46.28,34.72 J3.2
SF_CLK: length 12.3
  TOP w0.2: U2.6 38.02,34.87 38.04,34.84 38.56,34.84 39.2,34.21 39.2,28.52 41.1,26.62 U1.59
SF_CS: length 25.4
  TOP w0.2: v1(38.61,33.88) 38.61,28.6 40.7,26.51 U1.60 ; R3.1 27.9,39.9 27.9,39.15 29.05,38 U2.1 v1(30.36,37.41)
  BOTTOM w0.2: v1(30.36,37.41) 38.06,37.41 38.61,36.85 v1(38.61,33.88)
SF_MISO: length 19.6
  TOP w0.2: U1.61 40.3,26.38 38.09,28.59 38.09,33.65 38.08,33.66 38.08,33.86 37.71,34.23 v1(35.46,34.23) ; U2.2 29.05,36.14 v1(30.33,36.14)
  BOTTOM w0.2: v1(30.33,36.14) 33.56,36.14 v1(35.46,34.23)
SF_MOSI: length 10
  TOP w0.2: U2.5 36.95,28.5 37.52,27.94 38.21,27.94 39.9,26.24 U1.62
SVREF: length 8.2
  TOP w0.2: 51.58,20.48 50.91,19.8 U1.33 ; 51.58,20.48 C43.2 51.6,20.52 R34.1 ; 51.58,20.48 C47.1 C48.1 51.6,18.48 R37.2
TWI0_SCK: length 20.2
  TOP w0.2: R12.1 61.52,16.5 60.86,17.16 U4.6 60.86,21.94 v1(60.74,22.07) ; U1.38 49.06,21.8 v1(49.84,22.58)
  BOTTOM w0.2: v1(60.74,22.07) 60.23,22.58 v1(49.84,22.58)
TWI0_SDA: length 20.6
  TOP w0.2: U1.37 49.5,21.4 v1(49.82,21.71) ; R13.1 61.05,15 59.57,16.48 59.59,16.51 U4.5 59.57,20.53 v1(59.57,21.71)
  BOTTOM w0.2: v1(49.82,21.71) v1(59.57,21.71)
UART0_RX: length 26.9
  TOP w0.2: U1.49 45.1,26.34 46.41,27.66 48.7,27.66
  TOP w0.25: v1(49.84,27.35) 49.54,27.66 48.7,27.66
  BOTTOM w0.2: 67.14,27.66 J2.2
  BOTTOM w0.25: 67.14,27.66 66.83,27.35 v1(49.84,27.35)
UART0_TX: length 25.5
  TOP w0.2: U1.48 45.5,26.16 46.46,27.12 48.8,27.12
  TOP w0.25: 48.8,27.12 v1(49.31,26.61)
  BOTTOM w0.25: v1(49.31,26.61) 67.54,26.61 68.08,27.15 J2.1
USB_DM: length 36.8
  TOP w0.2: U1.68 34.77,23.8 34.12,24.46 34.12,26.54 33.15,27.5 23.6,27.5 16.97,34.13 6.88,34.13 6.85,34.16 J4.2
USB_DP: length 36.9
  TOP w0.2: J4.3 17.11,33.52 23.48,27.15 32.95,27.15 33.69,26.41 33.69,24.02 34.31,23.4 U1.69
USB_ID: length 50
  TOP w0.2: 9.89,32.87 16.44,32.87 v1(18.51,30.79) ; 9.89,32.87 10.66,32.09 10.66,31.54 R8.1 ; 9.89,32.87 9.13,32.87 ; 47.83,26.59 46.46,26.59 45.9,26.03 U1.47
  TOP w0.25: 47.83,26.59 47.91,26.59 v1(48.11,26.39) ; 9.13,32.87 J4.4
  BOTTOM w0.2: 47.83,26.72 47.58,26.97 38.97,26.97 35.15,30.79 v1(18.51,30.79)
  BOTTOM w0.25: v1(48.11,26.39) 48.11,26.44 47.83,26.72
VRA1: length 7.9
  TOP w0.2: U1.81 v1(34.06,18.6) ; v1(31.37,18) 32.08,18 C44.1 32.1,18.02 R35.2
  BOTTOM w0.2: v1(31.37,18) 33.46,18 v1(34.06,18.6)
VRA2: length 8
  TOP w0.2: R36.2 32.1,16.98 C45.1 32.02,16.94 v1(31.37,16.94) ; v1(33.84,16.94) 34.7,17.8 U1.83
  BOTTOM w0.2: v1(33.84,16.94) v1(31.37,16.94)
VSYNC: length 54.1
  TOP w0.2: U1.29 49.57,18.2 51.29,16.48 55.81,16.48 62.57,9.72 v1(62.57,3.86) ; v1(51.64,1.72) 51.53,1.61 37.1,1.61 35.75,2.96 J1.33
  BOTTOM w0.2: v1(51.64,1.72) 60.56,1.72 60.76,1.92 60.76,1.93 62.57,3.73 v1(62.57,3.86) 62.57,3.91
X1: length 23.2
  TOP w0.2: v1(34.73,13.25) 33.75,12.28 J1.37 ; v1(37.42,25.07) 38.17,25.07 U1.66
  BOTTOM w0.2: v1(34.73,13.25) 37.29,15.82 37.29,24.94 v1(37.42,25.07)
X2: length 26.4
  TOP w0.2: J1.39 32.75,13.03 32.92,13.2 v1(32.92,13.25) ; U1.65 38.7,25.85 38.39,26.16 v1(36.33,26.16)
  BOTTOM w0.2: v1(36.33,26.16) 36.33,26.08 35.97,25.73 35.97,16.3 v1(32.92,13.25)
Y1: length 27.6
  TOP w0.2: v1(33.79,13.25) 33.25,12.72 J1.38 ; U1.64 39.1,26.03 38.46,26.67 37.19,26.67 36.91,26.95 v1(36.86,26.95)
  BOTTOM w0.2: v1(36.86,26.95) 36.86,25.55 36.35,25.04 36.35,15.82 v1(33.79,13.25) 33.76,13.23
Y2: length 31.3
  TOP w0.2: v1(32,13.27) 30.92,12.19 30.92,5.02 31.59,4.35 J1.40 ; v1(35.74,27.48) 38.16,27.48 39.5,26.13 U1.63
  BOTTOM w0.2: v1(35.74,27.48) 35.74,27.38 35.52,27.15 35.52,16.84 32,13.32 v1(32,13.27)
N101915: length 5.1
  TOP w0.2: R27.1 55.42,39 56.33,39.9 U7.2
  TOP w0.4: R26.1 55.4,40.02 C20.1 55.42,39.02 R27.1
N101919: length 6.9
  TOP w0.2: U7.3 57.27,39.5 56.65,38.87 56.65,37.25 55.9,36.5 C27.2
  TOP w0.3: C27.2 55.42,35.52 R31.2 R28.1
N101966: length 5.6
  TOP w0.2: C22.2 65.08,39.02 64.2,39.9 U7.14
  TOP w0.4: R29.2 R30.2 65.1,39.02 C22.2
N128635: length 6
  TOP w0.2: U5.6 15.49,15.91 18.29,13.1 18.29,12.16 L1.2
N129017: length 5
  TOP w0.2: U5.12 6.34,14.63 4.7,13 R15.1
N129187: length 5.6
  TOP w0.2: U5.7 15.5,17.18 18.68,14 R16.2
N129191: length 2.5
  TOP w0.2: C11.2 R16.1
N129199: length 10.8
  TOP w0.2: v1(16.44,17.08) 18.02,15.5 R17.1
  BOTTOM w0.2: v1(8.69,17.27) 16.24,17.27 16.42,17.08 v1(16.44,17.08)
N129203: length 2.5
  TOP w0.2: C12.1 R17.2
N129856: length 13.3
  TOP w0.25: 17.57,17 17.61,16.96 21.96,16.96 22,17 ; 17.57,17 16.13,18.45 U5.8 ; 17.57,17 22,17 ; 22,17 C13.2
N131139: length 8.1
  TOP w0.18: L4.2 57.5,31.5 59.2,33.2 U7.6
N132697: length 4
  TOP w0.2: U7.20 58.1,41.4 56.2,43.3 L2.2
N136168: length 3.2
  TOP w0.2: U7.11 62.8,38.7 63,38.5
  TOP w0.4: 63,38.5 64.3,37.2 L3.1
N140867: length 9.5
  TOP w0.2: 52.63,7.5 52.66,7.46 53.56,7.46 53.6,7.5 ; 52.63,7.5 D1.2 ; 52.63,7.5 53.6,7.5 ; 53.6,7.5 54.05,7.95 U8.1 54.03,8.18 v1(54.03,6.98)
  BOTTOM w0.2: v1(54.03,6.98) 54.03,6.63 53.5,6.1 50.7,6.1 v1(50.04,6.75)
N153627: length 4.1
  TOP w0.2: R21.2 20.1,22.9 20.1,21.6 R22.1
  TOP w0.25: C18.2 R22.1
N153631: length 22.7
  TOP w0.25: C15.1 C19.2 19.47,20 18.9,20.57 18.9,21.4 R22.2 4.93,21.5 U6.1
N181376: length 7.9
  TOP w0.2: 20.12,40 21.2,41.08 SW3.4 ; 20.12,40 R23.2 ; 20.12,40 R24.1
N181384: length 8.4
  TOP w0.2: R24.2 25.6,40.1 25.6,41.21 26.79,42.4 SW4.4 28.77,42.4 31.18,40 R25.1
N181692: length 3.5
  TOP w0.2: SW5.4 33.55,42.4 32.6,41.45 32.6,40.1 R25.2
N218026: length 8.9
  TOP w0.2: R4.2 44.1,29.1 44.3,29.3 ; 44.3,29.3 Y1.3 ; 44.3,29.3 43.3,29.3 43.1,29.5 43.1,32.1 43.5,32.5 C3.2 44.08,32.52 45.05,33.5 R2.2
N1977121: length 1.2
  TOP w0.2: R20.1 C16.2

## Copper pours and planes (outline as drawn; the poured copper is in the pictures)
GND on TOP: 0,2.5 0.73,0.73 2.5,0 73.25,0 75.02,0.73 75.75,2.5 75.75,42.5 75.02,44.27 73.25,45 2.5,45 0.73,44.27 0,42.5 ; 4 cut-outs
GND on BOTTOM: 0,2.5 0.73,0.73 2.5,0 73.25,0 75.02,0.73 75.75,2.5 75.75,42.5 75.02,44.27 73.25,45 2.5,45 0.73,44.27 0,42.5 ; 4 cut-outs
